# Allegro board PCB1.brd
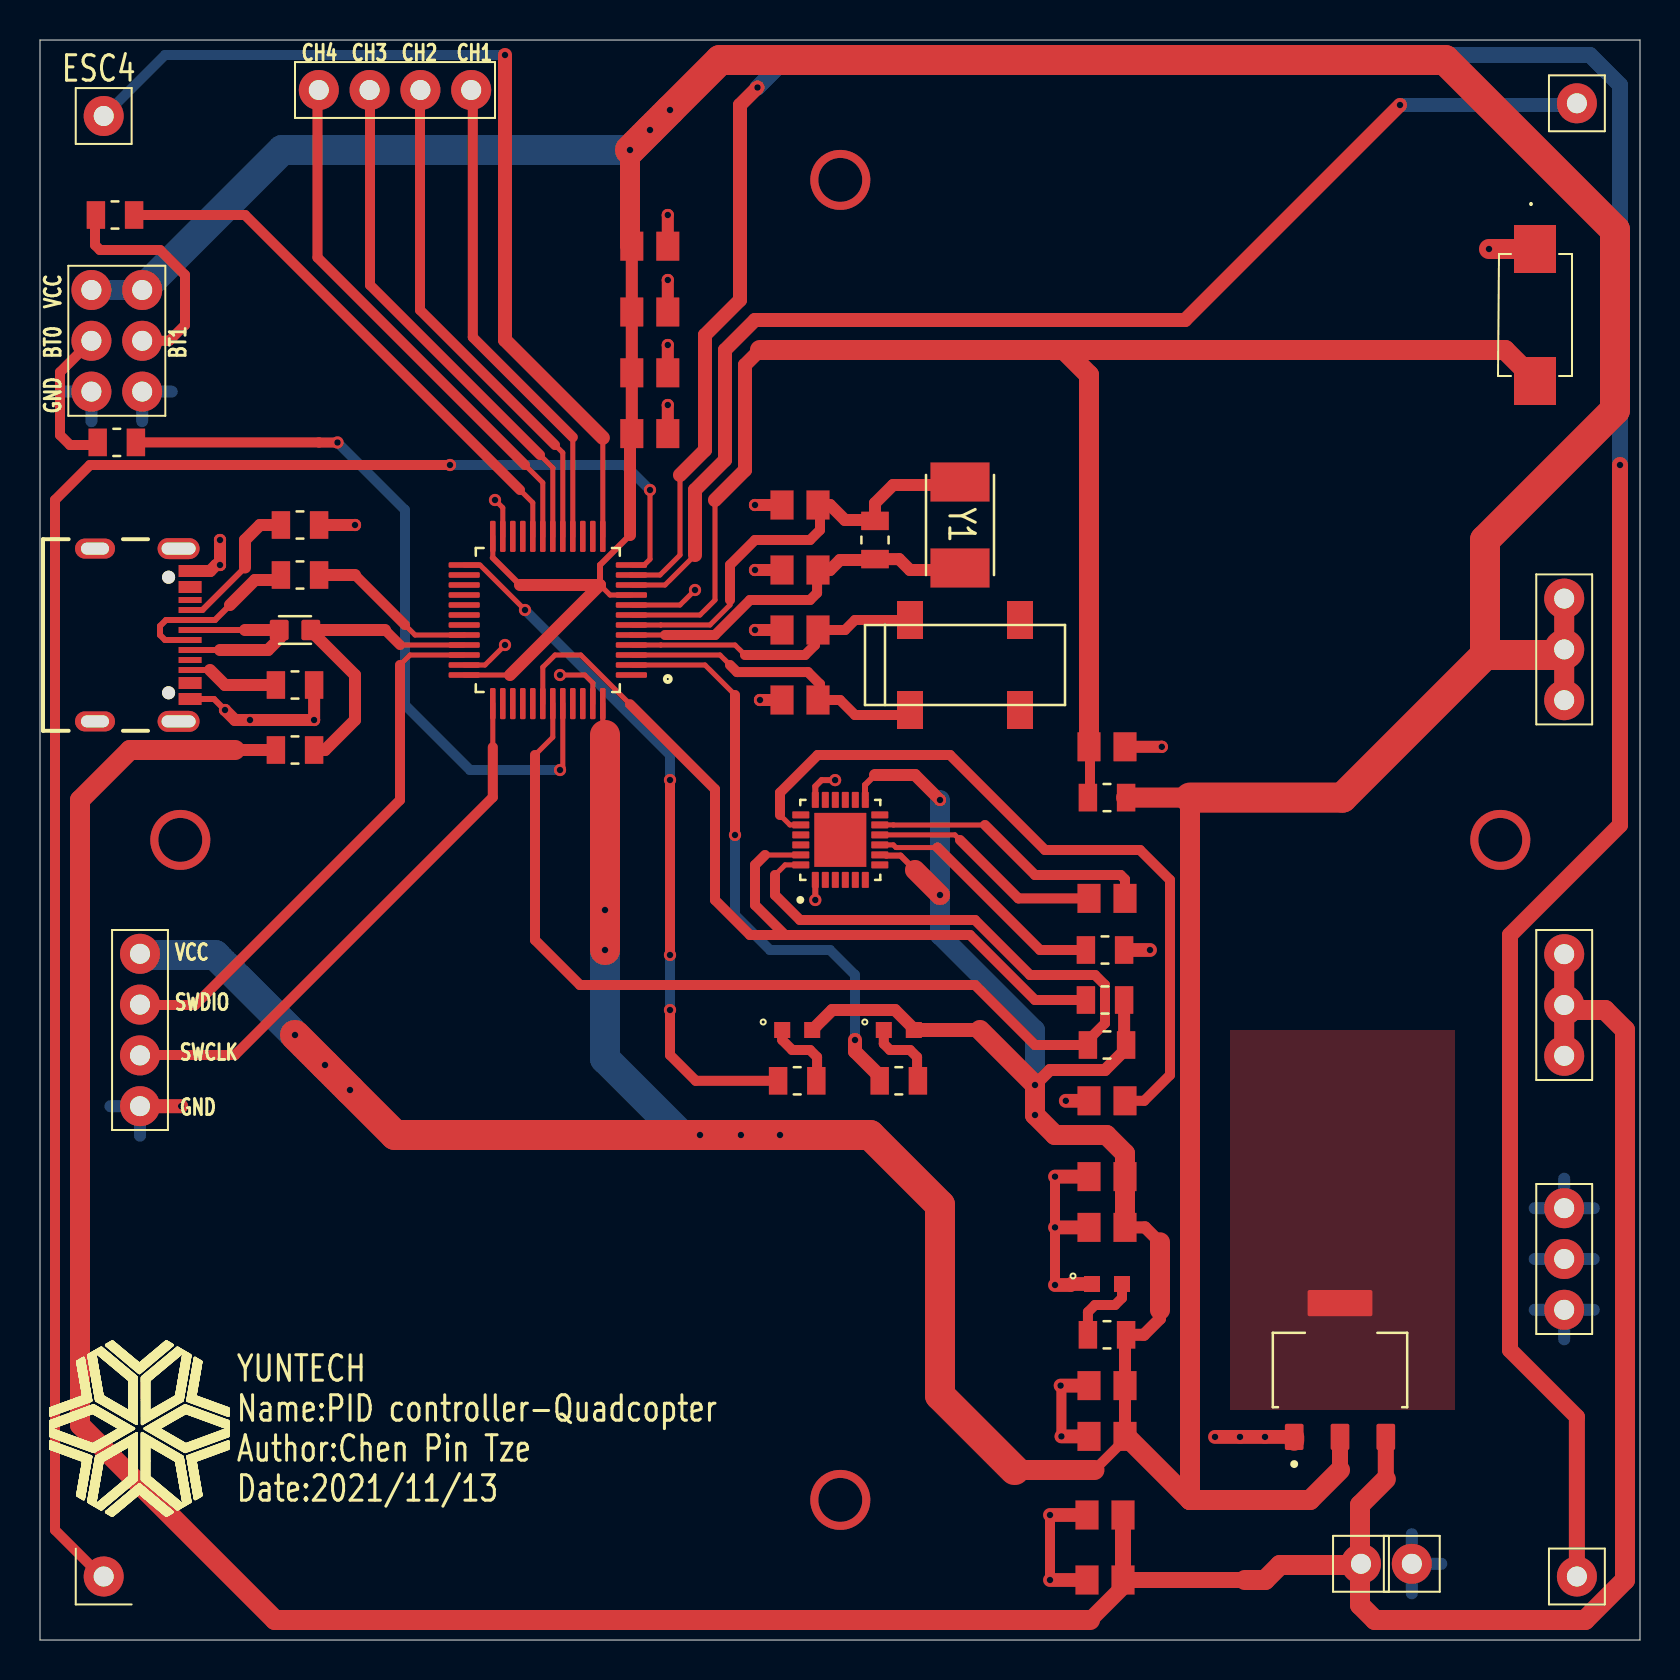
[diagram p0: board, top side]
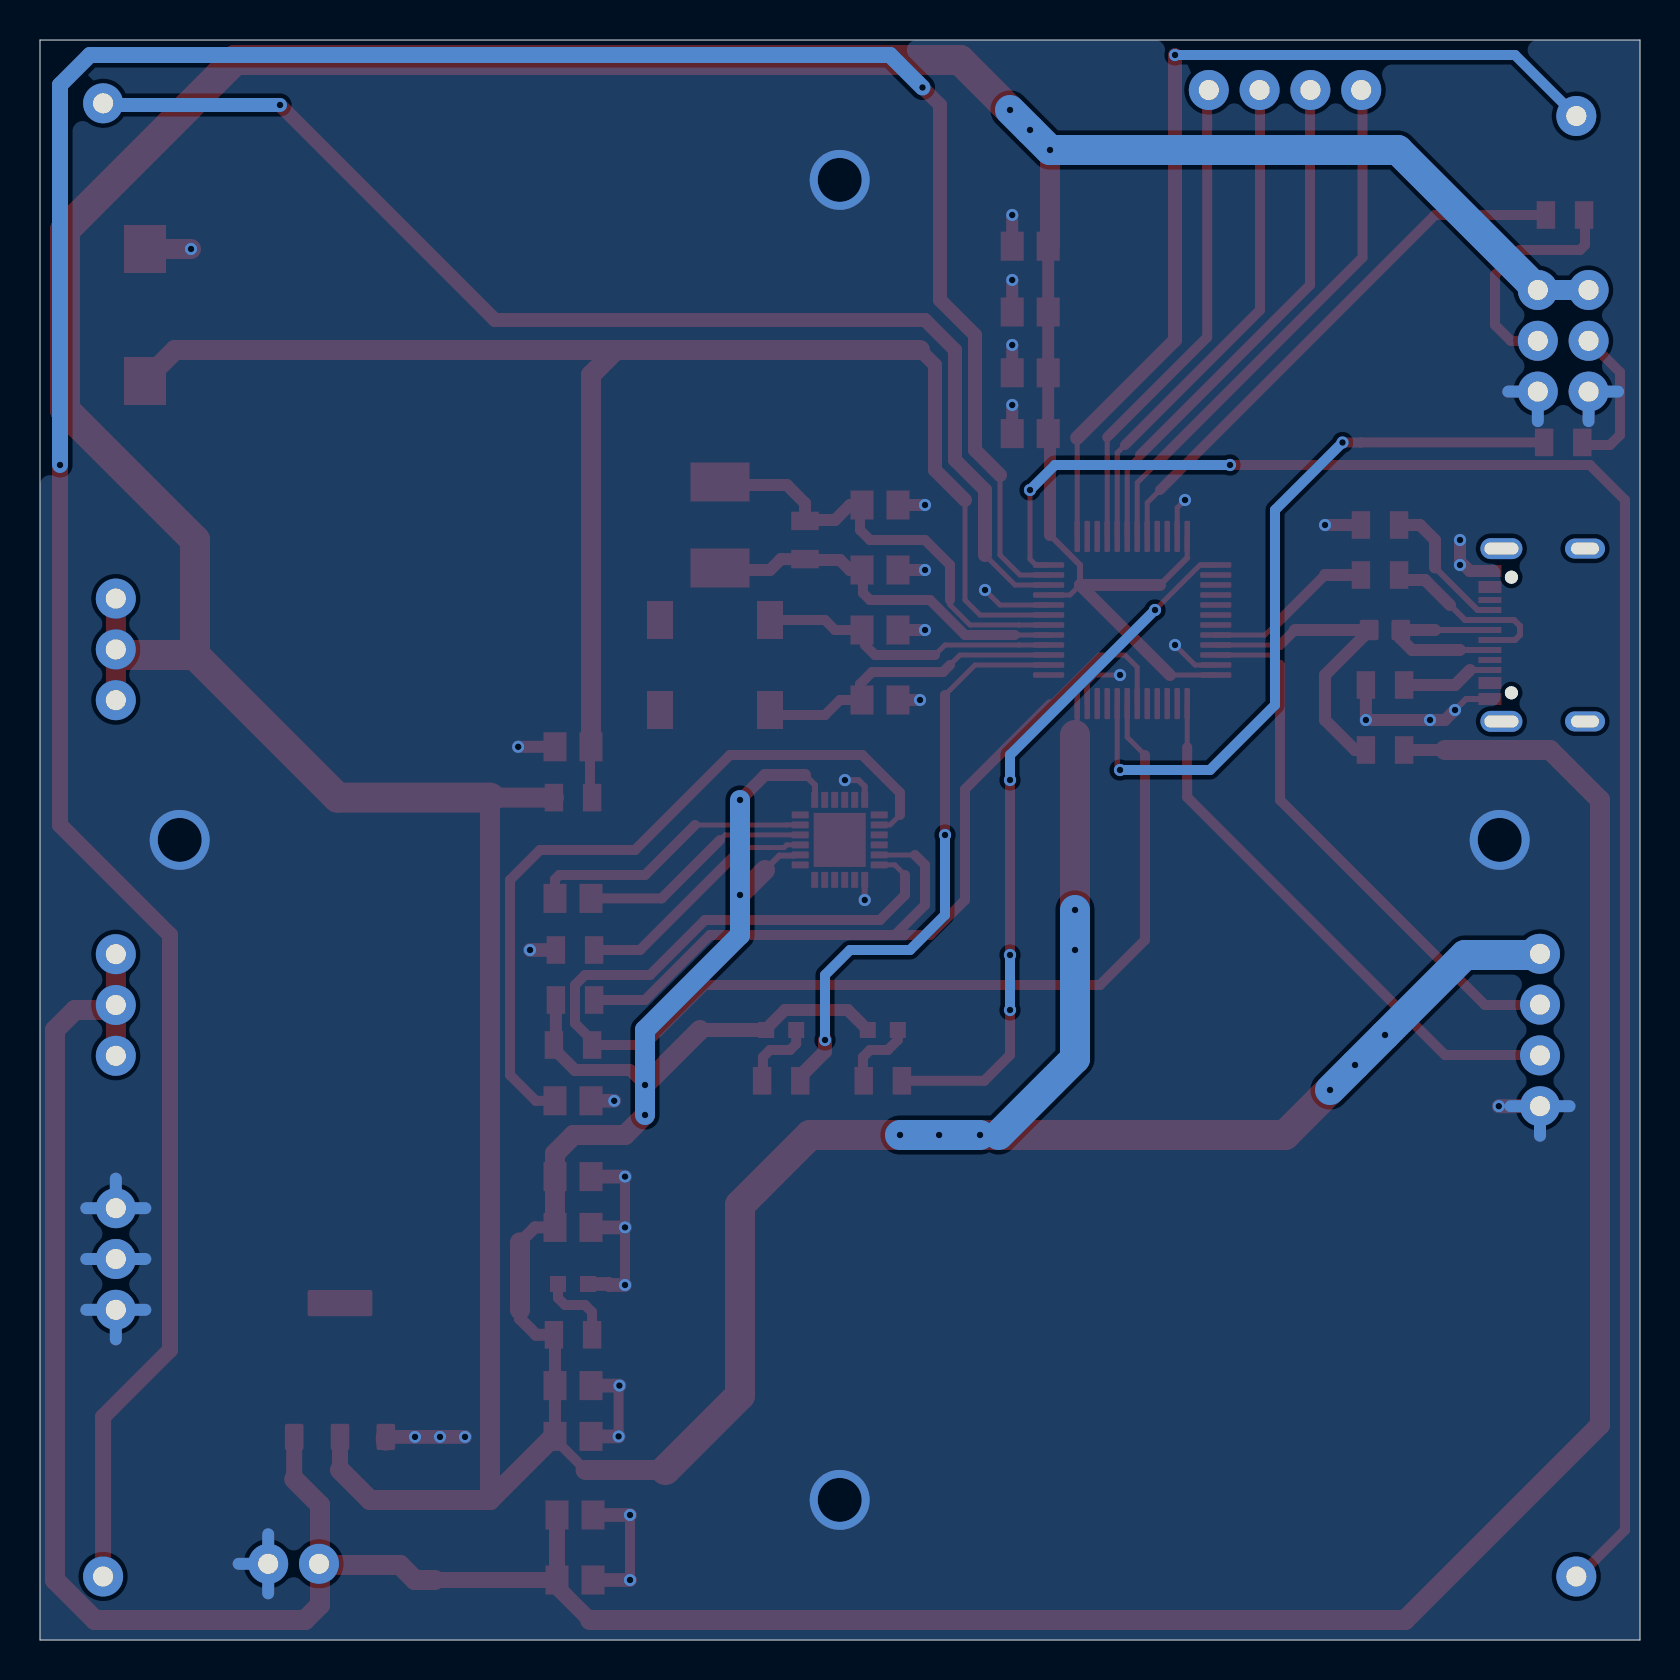
[diagram p1: board, bottom side, seen from below]

Outline 80 x 80 mm; copper layers: TOP, BOTTOM. Coordinates in mm from the lower left corner of the outline.
Outline path: 0,80 0,0 80,0 80,80 0,80

## Design rules (mm)
constraint set DEFAULT: min track width 0.127

## Placement (name value [footprint] x y rotation side)
BOOT  -  [BOOT]  3.84 64.96 0 top
C2  1uF  [CAPC2012X140N]  53.35 44.66 180 top
C3  100n  [CAPC2012X140N]  30.49 66.4 180 top
C4  100n  [CAPC2012X140N]  30.49 69.69 180 top
C8T6  f103c8t6 U1  [QFP50P900X900X160-48N]  29.75 48.5 180 top
C9  20pF  [CAPC2012X140N]  38 47 0 top
C10  100n  [CAPC2012X140N]  30.49 63.36 180 top
C11  100n  [CAPC2012X140N]  30.49 60.32 180 top
C12  20pF  [CAPC2012X140N]  38 50.5 0 top
C13  20pF  [CAPC2012X140N]  38 53.5 0 top
C14  20pF  [CAPC2012X140N]  38 56.75 0 top
C15  0.01uF  [CAPC2012X140N]  53.35 23.17 180 top
C16  0.1uF  [CAPC2012X140N]  53.35 37.08 180 top
C17  220pF  [CAPC2012X140N]  53.35 26.96 0 top
C18  0.1uF  [CAPC2012X140N]  53.35 20.63 0 top
C20  10uF  [CAPC2012X140N]  53.35 10.18 0 top
C21  0.1uF  [CAPC2012X140N]  53.35 12.72 0 top
C22  0.1uF  [CAPC2012X140N]  53.25 6.25 0 top
C23  10uF  [CAPC2012X140N]  53.25 3 0 top
D3  LED  [LEDM1608X55]  42.94 30.5 0 top
D4  LED  [LEDM1608X55]  53.35 17.8 0 top
D5  LED  [LEDM1608X55]  37.86 30.5 0 top
ESC1  esc1  [ESC]  76.84 76.83 0 top
ESC2  esc2  [ESC]  76.84 3.17 0 top
ESC3  esc3  [ESC]  3.19 3.17 0 top
ESC4  esc4  [ESC]  3.19 76.2 0 top
GND  gnd  [VCC3]  76.21 19.05 0 top
MPU6050  MPU6050  [IC_MPU6050]  40.02 40.01 90 top
P5V  PINPAD  [ESC]  66.05 3.81 0 top
PGND  PINPAD  [ESC]  68.59 3.81 0 top
R2  10k  [RESC2012X60N]  53.35 42.12 180 top
R3  100k  [RESC2012X60N]  3.84 59.88 180 top
R4  100k  [RESC2012X60N]  3.75 71.25 0 top
R5  510  [RESC2012X60N]  42.94 27.96 180 top
R9  20  [RESC2012X60N]  13 53.25 0 top
R10  1.5k  [RESC2012X60N]  12.75 44.5 180 top
R11  20  [RESC1608X50N]  12.75 50.5 0 top
R12  4.7k  [RESC2012X60N]  53.25 32 180 top
R13  4.7k  [RESC2012X60N]  53.35 29.75 0 top
R14  4.7k  [RESC2012X60N]  53.25 34.5 180 top
R15  510  [RESC2012X60N]  53.35 15.26 180 top
R16  510  [RESC2012X60N]  37.86 27.96 180 top
R111  1M  [RESC2012X60N]  41.75 55 90 top
R112  5.1K  [RESC2012X60N]  12.75 47.75 0 top
R113  5.1K  [RESC2012X60N]  13 55.75 0 top
RECIVER  reciver  [CH4B]  17.75 77.5 270 top
ST-LINK  SWD  [SMD]  5 30.5 0 top
SW1  RST  [PTS636SM25FSMTRLFS]  74.75 66.25 270 top
TYPE-C  typec  [GCT_USB4105-GF-A]  2.75 50.25 270 top
UNK3.3V  3.3V  [VCC3]  76.21 49.53 0 top
UNK5V  +5V  [VCC3]  76.21 31.75 0 top
UNK1117  AMS1117-3.3  [SOT229P700X180-4N]  65 13.5 90 top
Y1  8MHz  [XTAL500X320X130N]  46 55.75 270 top
Y2  CRYSTAL1-4/SM  [MC-306]  46.25 48.75 0 top

## Library data of the parts
BOOT = BOOT_0
C2-C4 C9-C18 C20-C23 = C
C8T6 = f103c8t6 U1_4
D3 D5 = LED_5
D4 = LED_6
ESC1-ESC4 = esc_0
GND = gnd_0
MPU6050 = MPU6050
P5V PGND = PINPAD
R2-R5 R9-R16 R112 R113 = R_7
R111 = R_8
RECIVER = reciver
ST-LINK = ST-LINK
SW1 = SW PUSHBUTTON-SPST
TYPE-C = typec_1
UNK3.3V = 3_0.3V
UNK5V = +5V
UNK1117 = AMS1117-3_2.3
Y1 = CRYSTAL
Y2 = CRYSTAL1-4/SM

## Footprints (pads in the part's own frame, mm; a bottom-side part is the same pattern mirrored in y, then rotated)
BOOT
  round 2 hole 1: 1(-1.27,2.54) 2(-1.27,0) 3(-1.27,-2.54) 4(1.27,-2.54) 5(1.27,0) 6(1.27,2.54)
CAPC2012X140N
  rect 1.15x1.45 smd: 1(-0.9,0) 2(0.9,0)
CH4B
  round 2 hole 1: 1(0,3.81) 2(0,1.27) 3(0,-1.27) 4(0,-3.81)
ESC
  round 2 hole 1: 1(0,0)
GCT_USB4105-GF-A
  round 0.65 hole 0.65 unplated: (-2.89,3.68) (2.89,3.68)
  rect 0.6x1.15 smd: A1_B12(-3.2,4.755) A4_B9(-2.4,4.755) B1_A12(3.2,4.755) B4_A9(2.4,4.755)
  rect 0.3x1.15 smd: A5(-1.25,4.755) A6(-0.25,4.755) A7(0.25,4.755) A8(1.25,4.755) B5(1.75,4.755) B6(0.75,4.755) B7(-0.75,4.755) B8(-1.75,4.755)
  oval 1.05x2.1 hole 0.6x1.7: S1(-4.32,4.18) S4(4.32,4.18)
  oval 1x2 hole 0.6x1.4: S2(-4.32,0) S3(4.32,0)
IC_MPU6050
  custom 0.8x0.35 smd: (-2,0.75) (-2,0.25) (-2,-0.25) (-2,-0.75) (2,0.75) (2,0.25) (2,-0.25) (2,-0.75) 1(-2,1.25) 6(-2,-1.25) 13(2,-1.25) 18(2,1.25)
  rect 2.7x2.6 smd: (0,0)
  custom 0.35x0.85 smd: 7(-1.25,-1.975) 8(-0.75,-1.975) 9(-0.25,-1.975) 10(0.25,-1.975) 11(0.75,-1.975) 12(1.25,-1.975) 19(1.25,1.975) 20(0.75,1.975) 21(0.25,1.975) 22(-0.25,1.975) 23(-0.75,1.975) 24(-1.25,1.975)
LEDM1608X55
  rect 0.8x0.8 smd: A(0.75,0) C(-0.75,0)
MC-306
  rect 1.3x1.9 smd: 1(-2.75,-2.25) 2(2.75,-2.25) 3(2.75,2.25) 4(-2.75,2.25)
PTS636SM25FSMTRLFS
  rect 2.4x2.1 smd: 1(-3.3,0) 2(3.3,0)
QFP50P900X900X160-48N
  custom 1.56x0.279 smd: 1(0.18,0.25) 2(0.18,-0.25) 3(0.18,-0.75) 4(0.18,-1.25) 5(0.18,-1.75) 6(0.18,-2.25) 7(0.18,-2.75) 8(0.18,-3.25) 9(0.18,-3.75) 10(0.18,-4.25) 11(0.18,-4.75) 12(0.18,-5.25) 25(8.54,-5.25) 26(8.54,-4.75) 27(8.54,-4.25) 28(8.54,-3.75) 29(8.54,-3.25) 30(8.54,-2.75) 31(8.54,-2.25) 32(8.54,-1.75) 33(8.54,-1.25) 34(8.54,-0.75) 35(8.54,-0.25) 36(8.54,0.25)
  custom 0.279x1.56 smd: 13(1.61,-6.68) 14(2.11,-6.68) 15(2.61,-6.68) 16(3.11,-6.68) 17(3.61,-6.68) 18(4.11,-6.68) 19(4.61,-6.68) 20(5.11,-6.68) 21(5.61,-6.68) 22(6.11,-6.68) 23(6.61,-6.68) 24(7.11,-6.68) 37(7.11,1.68) 38(6.61,1.68) 39(6.11,1.68) 40(5.61,1.68) 41(5.11,1.68) 42(4.61,1.68) 43(4.11,1.68) 44(3.61,1.68) 45(3.11,1.68) 46(2.61,1.68) 47(2.11,1.68) 48(1.61,1.68)
RESC1608X50N
  custom 0.94x1.02 smd: 1(-0.79,0) 2(0.79,0)
RESC2012X60N
  rect 0.92x1.38 smd: 1(-0.955,0) 2(0.955,0)
SMD
  round 2 hole 1: 1(0,3.81) 2(0,1.27) 3(0,-1.27) 4(0,-3.81)
SOT229P700X180-4N
  custom 1.31x0.93 smd: 1(-3.345,2.29) 2(-3.345,0) 3(-3.345,-2.29)
  custom 1.31x3.24 smd: 4(3.345,0)
VCC3
  round 2 hole 1: 1(0,2.54) 2(0,0) 3(0,-2.54)
XTAL500X320X130N
  rect 1.95x2.95 smd: 1(-2.15,0) 2(2.15,0)

## Nets
+5V: C22.2 C23.2 P5V.1 R10.2 UNK5V.1 UNK5V.2 UNK5V.3 UNK1117.3
GND: BOOT.3 BOOT.4 C2.1 C3.1 C4.1 C8T6.8 C8T6.23 C8T6.35 C8T6.47(VSS_3) C9.1 C10.1 C11.1 C12.1 C13.1 C14.1 C15.2 C17.1 C18.1 C20.1 C21.1 C22.1 C23.1 D4.C(2) GND.1 GND.2 GND.3 MPU6050.1 MPU6050.18 PGND.1 R14.1 R112.2 R113.2 ST-LINK.4 SW1.1 TYPE-C.A1_B12 TYPE-C.B1_A12 UNK1117.1
VBAT: C8T6.1
VCC_3.3: BOOT.1 BOOT.6 C3.2 C4.2 C8T6.9 C8T6.24 C8T6.36 C8T6.48 C10.2 C11.2 C15.1 C18.2 C20.2 C21.2 D3.A D5.A MPU6050.8(VOLGIC) MPU6050.13 R2.1 R12.1 R13.2 R15.1 ST-LINK.1 UNK3.3V.1 UNK3.3V.2 UNK3.3V.3 UNK1117.2
AD0: MPU6050.9 R14.2
BOOT0: C8T6.44 R3.1
BOOT1: C8T6.20 R4.2
INT: MPU6050.12
OSCIN: C8T6.5 C13.2 R111.1 Y1.2
OSCOUT: C8T6.6 C14.2 R111.2 Y1.1
PA0: C8T6.10 ESC1.1(ESC)
PA1: C8T6.11 ESC2.1(ESC)
PA2: C8T6.12 ESC3.1(ESC)
PA3: C8T6.13 ESC4.1(ESC)
PA4: C8T6.14
PA5: C8T6.15
PA6: C8T6.16 RECIVER.1
PA7: C8T6.17 RECIVER.2
PA8: C8T6.29
PA9: C8T6.30
PA10: C8T6.31
PA11: C8T6.32 R9.2
PA12: C8T6.33 R10.1 R11.2
PA15: C8T6.38
PB0: C8T6.18 RECIVER.3
PB1: C8T6.19 RECIVER.4(CH4)
PB3: C8T6.39
PB4: C8T6.40
PB5: C8T6.41
PB6: C8T6.42 MPU6050.23 R12.2
PB7: C8T6.43 MPU6050.24 R13.1
PB8: C8T6.45
PB9: C8T6.46
PB10: C8T6.21
PB11: C8T6.22
PB12: C8T6.25 R16.2
PB13: C8T6.26
PB14: C8T6.27
PB15: C8T6.28
PC13: C8T6.2 R5.2
PC14: C8T6.3 C9.2 Y2.1
PC15: C8T6.4 C12.2 Y2.4
RESET: C2.2 C8T6.7 R2.2 SW1.2
SWCLK: C8T6.37 ST-LINK.3
SWDIO: C8T6.34 ST-LINK.2
TAB: UNK1117.4
XCL: MPU6050.7
XDA: MPU6050.6
N06122: R11.1 TYPE-C.A6 TYPE-C.B6
N09656: BOOT.5(BOOT1) R4.1
N09709: BOOT.2 R3.2
N11831: C16.2 MPU6050.10
N11835: C16.1 MPU6050.11
N12082: C17.2 MPU6050.20
N63694: R9.1 TYPE-C.A7 TYPE-C.B7
N64017: R112.1 TYPE-C.B5
N64047: R113.1 TYPE-C.A5
N239790: D4.A R15.2
N245580: D3.C(2) R5.1
N256680: D5.C(2) R16.1

Pads without a net: MPU6050 19 21 22; TYPE-C A4_B9 A8 B4_A9 B8 S1 S2 S3 S4; Y2 2 3

## Via types
v1: diameter 0.61, hole 0.33, TOP to BOTTOM, 64 vias
v2: diameter 3, hole 2.2, TOP to BOTTOM, 4 vias

## Routing (per net, layer and track width the routed paths; a pad name or vN(x,y) marks a point on that pad's centre or on a via; arc(x,y) is an arc through that point)
+5V: length 174.8
  TOP w0.6: 9.75,44.5 R10.2 ; C23.2 54.25,2.75
  TOP w0.8: 54.25,2.75 52.5,1 ; 54,3 C23.2 ; C23.2 60.25,3 ; C23.2 C22.2 ; UNK1117.3 67.29,8.04
  TOP w1: 60.25,3 61.25,3 62,3.75 66,3.75 ; UNK5V.2 76.25,32 76.75,31.5 78.25,31.5 79.25,30.5 79.25,3 77.25,1 66.75,1 66,1.75 66,3.75 ; UNK5V.2 UNK5V.3 ; UNK5V.2 UNK5V.1 ; 67.29,8.04 66,6.75 66,3.81 ; 66,3.81 66,3.75 ; 66,3.81 P5V.1 ; 9.75,44.5 4.5,44.5 2,42 2,10.75 11.75,1 52.5,1
GND: length 100.5
  TOP w0.25: v1(23.25,49.75) 22.25,48.75 C8T6.35 ; C8T6.47 27.64,47.85 27.24,48.25 v1(26,48.25) ; C8T6.23 23.14,56.61 v1(22.75,57) ; v1(32.75,52.5) 32,51.75 C8T6.8
  TOP w0.3: MPU6050.18 38.77,42.68 39.08,42.99 v1(39.76,42.99) ; TYPE-C.B1_A12 8.7,47.05 v1(9.25,46.5) ; MPU6050.1 v1(38.77,37)
  TOP w0.5: v1(51.07,10.18) 51.07,12.57 ; 51.07,12.57 v1(51.03,12.72) ; 51.07,12.57 51.25,12.75 ; v1(50.5,3) v1(50.5,6.25) ; v1(50.75,17.75) v1(50.75,20.63) v1(50.75,23.17) 50.75,23.25
  TOP w0.6: TYPE-C.A1_B12 8.51,53.45 8.81,53.75 v1(9,53.75) v1(9,55) ; C3.1 v1(31.39,68) ; C11.1 v1(31.39,61.75) ; C2.1 v1(56.09,44.66) ; C10.1 v1(31.39,64.75) ; C12.1 v1(35.75,50.5) ; C4.1 v1(31.39,71.25) ; C9.1 v1(36,47) ; R112.2 v1(13.71,46) v1(10.5,46) 9.75,46 v1(9.25,46.5) ; C13.1 v1(35.75,53.5) ; C14.1 v1(35.75,56.75) ; R113.2 v1(15.75,55.75)
  TOP w0.69: C17.1 v1(51.29,26.96) ; v1(50.75,17.75) 51.53,17.75 51.58,17.8 D4.C ; v1(58.75,10.16) v1(60,10.16) v1(61.25,10.16) UNK1117.1 ; C21.1 v1(51.03,12.72) ; R14.1 v1(55.5,34.5) ; C18.1 v1(50.75,20.63) ; C22.1 v1(50.5,6.25) ; C23.1 v1(50.5,3) ; C15.2 v1(50.75,23.17) ; C20.1 v1(51.07,10.18)
  TOP w0.7: ST-LINK.4 v1(7.06,26.69)
  TOP w1: SW1.1 v1(72.45,69.55) ; 62.71,9.97 UNK1117.1
  BOTTOM w0.6: 2.57,60.94 BOOT.3 1.09,62.42 ; 74.73,21.59 GND.1 ; GND.1 77.69,21.59 ; GND.1 76.21,23.07 ; 74.73,19.05 GND.2 77.69,19.05 ; 6.59,62.42 BOOT.4 5.11,60.94 ; ST-LINK.4 6.48,26.69 ; ST-LINK.4 5,25.21 ; ST-LINK.4 3.52,26.69 ; 76.21,15.03 GND.3 ; GND.3 77.69,16.51 ; GND.3 74.73,16.51 ; PGND.1 70.07,3.81 ; PGND.1 68.59,2.33 ; PGND.1 68.59,5.29
  vias: v2(7.01,40.01) v2(40.01,73) v2(40.01,7) v2(73.01,40.01)
VCC_3.3: length 403.7
  TOP w0.25: 28,52.75 28.5,52.25 C8T6.9 ; C8T6.48 28.14,45.36 28.25,45.25 ; C8T6.24 22.64,54.11 ; C8T6.36 23.5,48.25
  TOP w0.3: MPU6050.8 42.25,39.26 42.32,39.22 43.03,39.22 43.75,38.5 ; 28,52.75 28,53.75 29.5,55.25 ; 41.25,42.01 41.25,42 ; 41.25,42.01 41.25,42.75 41.75,43.25 ; 41.25,42.01 MPU6050.13 ; 22.64,54.11 24,52.75
  TOP w0.5: 52.72,8.5 54.25,10.03 C20.2
  TOP w0.6: 29.5,60 29.75,60.25 C11.2 29.59,60.34 ; 29.5,60 29.5,55.25 ; 29.5,60 29.5,60.25 29.59,60.34 ; 41.75,43.25 43.75,43.25 v1(45,42) ; 76.21,46.96 UNK3.3V.3 76,46.75 76.25,46.5 ; R12.1 54.2,29.8 R13.2 54.25,29.5 53.25,28.5 50.5,28.5 v1(49.75,27.75) ; 56,19.88 55.25,20.63 C18.2 ; 43.75,30.5 42.75,31.5 39.61,31.5 D5.A ; 29.59,60.34 C10.2 C3.2 C4.2 ; C20.2 C21.2 54.25,15 R15.1 55.19,15.26 56,16.07 56,16.5 ; 2.75,67.5 BOOT.1 ; 23.5,48.25 28,52.75 24,52.75
  TOP w0.7: D3.A 47,30.5
  TOP w0.8: UNK1117.2 65,8.5
  TOP w1: 57.5,7 57.5,42.12 R2.1 ; 57.5,7 63.5,7 65,8.5 ; 57.5,7 54.25,10.25 ; C18.2 C15.1 54.25,24.32 53.32,25.25 50.75,25.25 v1(49.75,26.25) v1(49.75,27.75) 47,30.5 ; 56,16.5 56,19.88 ; v1(29.5,74.5) 29.5,69.75 C4.2 ; 76.21,49.25 UNK3.3V.3 ; 76.21,49.25 UNK3.3V.2 UNK3.3V.1 ; 76.21,49.25 76.25,49.25 ; 52.72,8.5 48.73,8.5 ; v1(45,37.25) 43.75,38.5
  TOP w1.5: 48.73,8.5 45,12.23 45,21.75 41.5,25.25 v1(37,25.25) v1(35.05,25.25) v1(33,25.25) 17.75,25.25 v1(15.5,27.5) v1(14.25,28.75) v1(12.75,30.25) ; 28.25,45.25 v1(28.25,36.5) v1(28.25,34.5) ; v1(29.5,74.5) v1(30.5,75.5) v1(31.5,76.5) 34,79 70.25,79 78.75,70.5 78.75,61.5 72.25,55 72.25,49.25 ; 72.25,49.25 76.21,49.25 ; 72.25,49.25 65.12,42.12 57.5,42.12
  BOTTOM w1: 2.5,67.5 BOOT.1 BOOT.6 ; 32.07,25.25 v1(33,25.25) ; v1(45,42) v1(45,37.25) 45,35.25 49.75,30.5 v1(49.75,27.75) v1(49.75,26.25) ; 5,34.25 ST-LINK.1
  BOTTOM w1.5: v1(31.5,76.5) v1(30.5,75.5) v1(29.5,74.5) 12.11,74.5 BOOT.6 ; v1(28.25,36.5) v1(28.25,34.5) 28.25,29.07 32.07,25.25 ; v1(15.5,27.5) v1(14.25,28.75) v1(12.75,30.25) 8.75,34.25 5,34.25 ; v1(33,25.25) v1(35.05,25.25) v1(37,25.25)
AD0: length 12.5
  TOP w0.25: MPU6050.9 42.67,39.76 42.8,39.62 44.88,39.62
  TOP w0.5: 44.88,39.62 50,34.5 R14.2
BOOT0: length 37.1
  TOP w0.25: C8T6.44 26.14,43.64 v1(26,43.5)
  TOP w0.5: v1(14.88,59.88) 13.95,59.88 13.95,59.88 R3.1
  BOTTOM w0.5: v1(26,43.5) 21.5,43.5 18.25,46.75 18.25,56.5 v1(14.88,59.88)
BOOT1: length 27.6
  TOP w0.25: C8T6.20 24.64,56.86 24,57.5
  TOP w0.5: R4.2 10.25,71.25 24,57.5
OSCIN: length 19.6
  TOP w0.25: 29.5,50.25 C8T6.5 31.25,50.25
  TOP w0.5: C13.2 38.85,53.4 38.85,52.35 38.5,52 35.5,52 33.75,50.25 31.25,50.25
  TOP w0.6: 42,54 41.75,54 ; 41.75,54 R111.1 42.95,54.05 43.5,53.5 46,53.5 ; 41.75,54 40,54 39.5,53.5 C13.2 ; Y1.2 46,53.5 ; 46,53.5 46.25,53.5
OSCOUT: length 22.6
  TOP w0.25: 34.5,52 34.5,51.75 33.5,50.75 31.04,50.75 31.04,50.75 C8T6.6
  TOP w0.5: 34.5,52 34.5,53.75 35.75,55 38.5,55 39,55.5 39,56.75
  TOP w0.6: Y1.1 46,57.75 42.66,57.75 41.75,56.84 41.75,56 ; 41.75,56 40.25,56 39.5,56.75 C14.2 ; 41.75,56 R111.2
PA0: length 62.8
  TOP w0.25: C8T6.10 31.25,52.75 32.75,54.25
  TOP w0.7: 32.75,54.25 32.75,57.5 34.25,59 34.25,64.5 35.75,66 57.25,66 v1(68,76.75)
  BOTTOM w0.7: 76.84,76.75 77.25,76.75 ; 76.84,76.75 v1(68,76.75) ; 76.84,76.75 ESC1.1
PA1: length 150.6
  TOP w0.25: 32,58.25 32,54.25 31,53.25 C8T6.11 29.5,53.25
  TOP w0.7: 32,58.25 33.25,59.5 33.25,65.25 35,67 35,76.75 v1(35.88,77.62)
  TOP w0.8: v1(79,58.75) 79,40.75 73.5,35.25 73.5,14.5 76.84,11.16 ESC2.1
  BOTTOM w0.8: v1(79,58.75) 79,77.75 77.5,79.25 37.5,79.25 v1(35.88,77.62)
PA2: length 90.7
  TOP w0.25: v1(30.5,57.5) 30.5,54.04 30.21,53.75 C8T6.12
  TOP w0.5: v1(20.5,58.75) 2.5,58.75 0.75,57 0.75,5.5 3.25,3 ESC3.1
  BOTTOM w0.5: v1(30.5,57.5) 29.25,58.75 v1(20.5,58.75)
PA3: length 47.4
  TOP w0.25: 28.14,60.11 C8T6.13
  TOP w0.7: 28.14,60.11 23.25,65 v1(23.25,79.25)
  BOTTOM w0.5: v1(23.25,79.25) 6.25,79.25 3.25,76.25 ESC4.1
PA6: length 24.4
  TOP w0.25: 26.64,60.14 C8T6.16
  TOP w0.5: RECIVER.1 21.64,77.14 21.64,65.14 26.64,60.14
PA7: length 25.3
  TOP w0.25: C8T6.17 26.14,59.36 25.75,59.75
  TOP w0.5: RECIVER.2 19,77.25 19,66.5 25.75,59.75
PA11: length 8.5
  TOP w0.25: 18.25,50.75 18.75,50.25 C8T6.32 21.25,50.25
  TOP w0.5: 15.75,53.25 18.25,50.75
  TOP w0.6: R9.2 15.75,53.25
PA12: length 16.1
  TOP w0.25: 18,49.75 C8T6.33
  TOP w0.5: 17.25,50.5 18,49.75
  TOP w0.6: R10.1 14.25,44.5 15.75,46 15.75,48.25 13.5,50.5 R11.2 17.25,50.5
PB0: length 26.1
  TOP w0.25: 25,59.25 25.64,58.61 C8T6.18
  TOP w0.5: RECIVER.3 16.5,77.25 16.5,67.75 25,59.25
PB1: length 27
  TOP w0.25: C8T6.19 25.14,57.86 24.25,58.75
  TOP w0.5: RECIVER.4 13.88,77.12 13.88,69.12 24.25,58.75
PB6: length 46.2
  TOP w0.25: C8T6.42 25.14,48.64 25.75,49.25 27.04,49.25 29.5,46.79 ; MPU6050.23 38,39.25 36.25,39.25
  TOP w0.5: R12.2 49.75,32 46.5,35.25 37.25,35.25 ; 29.5,46.79 33.75,42.54 33.75,37 35.5,35.25 37.25,35.25 ; 37.25,35.25 35.75,36.75 35.75,38.75 36.25,39.25
PB7: length 66.3
  TOP w0.25: MPU6050.24 37.26,38.76 36.75,38.25 ; C8T6.43 25.64,45.14 24.75,44.25 ; 52.4,29.98 R13.1
  TOP w0.5: 36.75,38.25 36.75,37.25 38,36 46.75,36 49.5,33.25 52.75,33.25 53.25,32.75 53.25,30.84 52.4,29.98 ; 24.75,44.25 24.75,35 27,32.75 46.75,32.75 49.75,29.75 R13.1 52.5,29.75
PB12: length 35.2
  TOP w0.25: v1(24.25,51.5) 22,53.75 C8T6.25
  TOP w0.5: v1(31.5,31.5) 31.5,29.25 32.79,27.96 R16.2 ; v1(31.5,34.25) v1(31.5,43)
  BOTTOM w0.5: v1(31.5,43) 31.5,44.25 v1(24.25,51.5) ; v1(31.5,31.5) v1(31.5,34.25)
PC13: length 29.8
  TOP w0.25: 34.75,47.25 33.25,48.75 C8T6.2
  TOP w0.5: v1(34.75,40.25) 34.75,47.25
  TOP w0.7: v1(40.75,30) 40.75,29.42 41.98,28.19 R5.2
  BOTTOM w0.5: v1(34.75,40.25) 34.75,36.25 36.5,34.5 39.5,34.5 40.75,33.25 v1(40.75,30)
PC14: length 16
  TOP w0.25: C8T6.3 34,49.25 34.5,48.75
  TOP w0.5: 39,47 40,47 40.75,46.25 43.5,46.25 Y2.1 ; 39,47 39,47.79 38.4,48.4 34.85,48.4 34.5,48.75 ; 39,47 C9.2
PC15: length 15.3
  TOP w0.25: 35.25,49.25 34.75,49.75 31.04,49.75 31.04,49.75 C8T6.4
  TOP w0.5: Y2.4 40.75,51 40.25,50.5 C12.2 38.75,50.5 38.75,49.75 38.25,49.25 35.25,49.25
RESET: length 80.6
  TOP w0.25: C2.2 52.5,44.5 52.25,44.75 ; R2.2 52.4,42.15 52.5,42.25 ; 33.75,57 33.75,52 33,51.25 C8T6.7
  TOP w0.5: 52.5,44.5 52.5,42.25
  TOP w0.7: 33.75,57 35.25,58.5 35.25,63.75 36,64.5
  TOP w1: 51.2,64.5 52.45,63.25 C2.2 ; 51.2,64.5 36,64.5 ; 51.2,64.5 73.25,64.5 74.75,63 SW1.2
SWCLK: length 27.7
  TOP w0.25: 22.64,44.64 C8T6.37
  TOP w0.5: 22.64,44.64 22.64,42.14 9.75,29.25 5,29.25 ST-LINK.3
SWDIO: length 27.4
  TOP w0.25: 18,48.75 18.5,49.25 C8T6.34
  TOP w0.5: ST-LINK.2 5,31.75 7.75,31.75 18,42 18,48.75
N06122: length 9.6
  TOP w0.3: 9,49.5 TYPE-C.B6 ; 10.25,50.5 TYPE-C.A6
  TOP w0.6: 10.25,50.5 R11.1 12,50.5 12,50.1 11.4,49.5 9,49.5
N09656: length 11.6
  TOP w0.25: R4.1 2.75,71.25
  TOP w0.5: BOOT.5 6.46,64.96 7.25,65.75 7.25,68.25 6,69.5 3,69.5 2.75,69.75 2.75,71.25
N09709: length 7.7
  TOP w0.25: 3,59.75 2.88,59.75 R3.2
  TOP w0.5: 2.88,59.75 1.5,59.75 1,60.25 1,63.39 BOOT.2
N11831: length 11.8
  TOP w0.25: MPU6050.10 45.74,40.26 46,40
  TOP w0.5: C16.2 48.92,37.08 46,40
N11835: length 14.3
  TOP w0.25: 47.25,40.75 42.67,40.75 42.67,40.76 MPU6050.11
  TOP w0.5: C16.1 54.25,38.03 54.03,38.25 49.75,38.25 47.25,40.75
N12082: length 37.8
  TOP w0.25: MPU6050.20 37.49,40.76 37,41.25
  TOP w0.5: 37,41.25 37,42.36 38.89,44.25 45.5,44.25 50.25,39.5 55,39.5 56.5,38 56.5,28.25 55.21,26.96 C17.2
N63694: length 9.3
  TOP w0.3: TYPE-C.A7 6.25,50 6,50.25 6,50.7 6.3,51 TYPE-C.B7 8.75,51 9.5,51.75
  TOP w0.6: R9.1 12,53 10.75,53 9.5,51.75
N64017: length 4.6
  TOP w0.3: 8.5,48.5 TYPE-C.B5 7.5,48.5
  TOP w0.6: R112.1 9.25,47.75 8.5,48.5
N64047: length 7.1
  TOP w0.3: TYPE-C.A5 8.12,51.5 10.25,53.63
  TOP w0.6: 10.25,53.63 10.25,55 11,55.75 R113.1
N239790: length 4
  TOP w0.2: 53.97,17.75 D4.A
  TOP w0.5: D4.A 54.1,17.1 53.75,16.75 52.75,16.75 52.4,16.4 52.4,15.35 R15.2
N245580: length 3.9
  TOP w0.5: 43.9,27.96 44,28 43.85,28.15 43.85,29.15 43.5,29.5 42.5,29.5 42.19,29.81 D3.C
N256680: length 4.2
  TOP w0.5: 39,27.75 R16.1 38.85,27.96 ; 38.85,27.96 38.85,29.15 38.5,29.5 37.61,29.5 37.11,30 D5.C ; 38.85,27.96 38.85,27.85

## Copper pours and planes (outline as drawn; the poured copper is in the pictures)
GND on BOTTOM: 0,80 0,0 80,0 80,80 ; 3 cut-outs
TAB on TOP: 59.5,30.5 59.5,11.5 70.75,11.5 70.75,30.5

## Text on the board
Ref Des/Silkscreen Top: CH4 | CH3 | CH2 | YUNTECH | Name:PID controller-Quadcopter | Author:Chen Pin Tze | Date:2021/11/13
User.6: FIGURE | FINISHED_SIZE | 0.3302 | 1.0 | 2.2 | 0.65 | 1.4x0.6 | 1.7x0.6 | TOLERANCE_DRILL | +0.15/-0.15 | +0.0/-0.0 | DRILL CHART: TOP to BOTTOM | ALL UNITS ARE IN MILLIMETERS | TOLERANCE_TRAVEL | - | PLATED | NON-PLATED | QTY | 64 | 29 | 4 | 2
